# EAGLE board PCB0M8B2 (EAGLE 6.2)
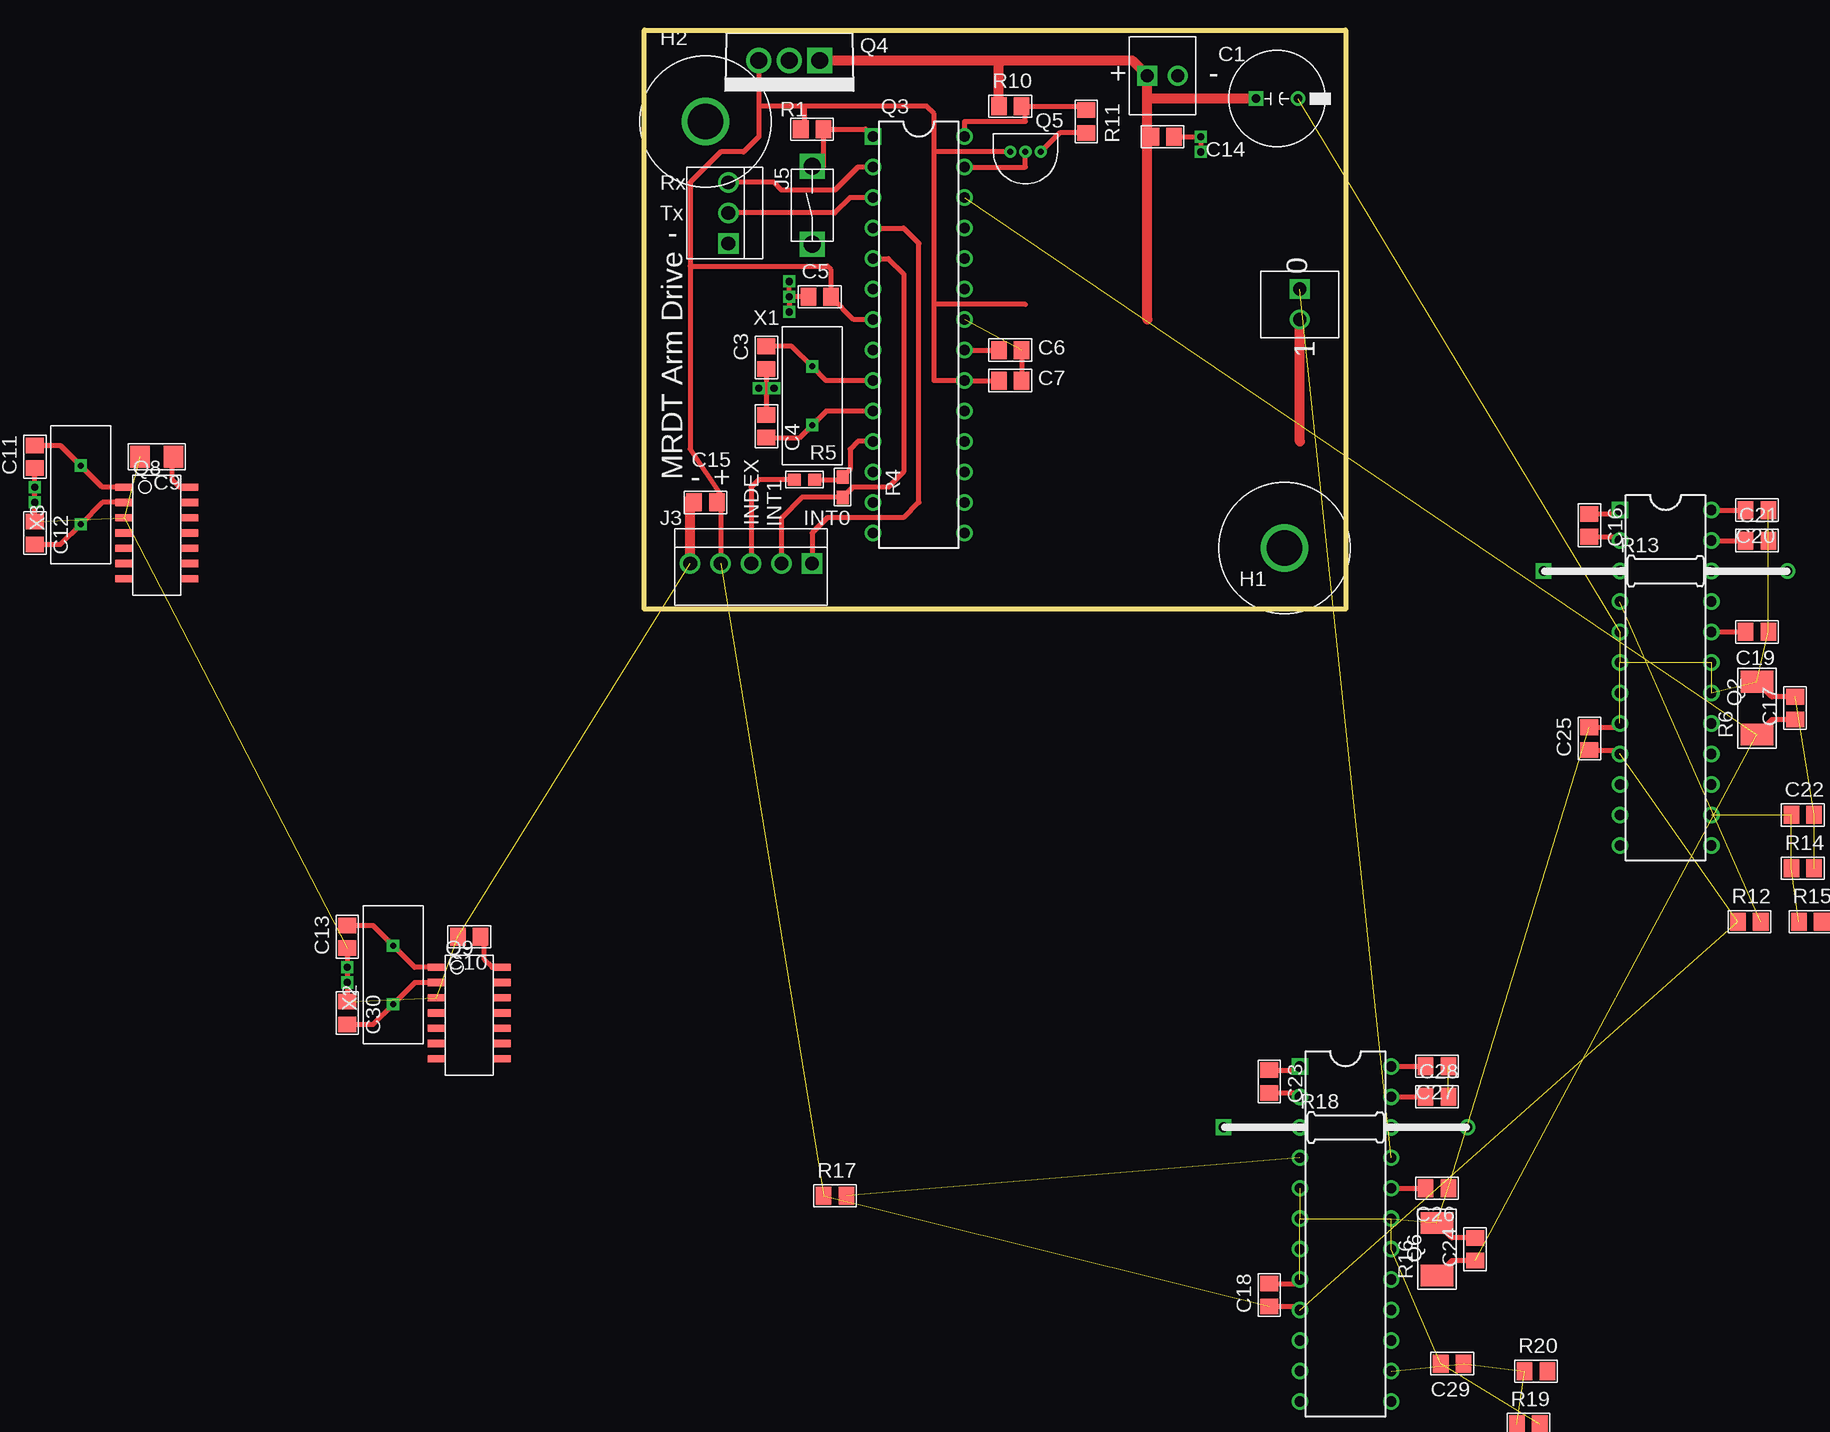
[diagram p0: board, top side]
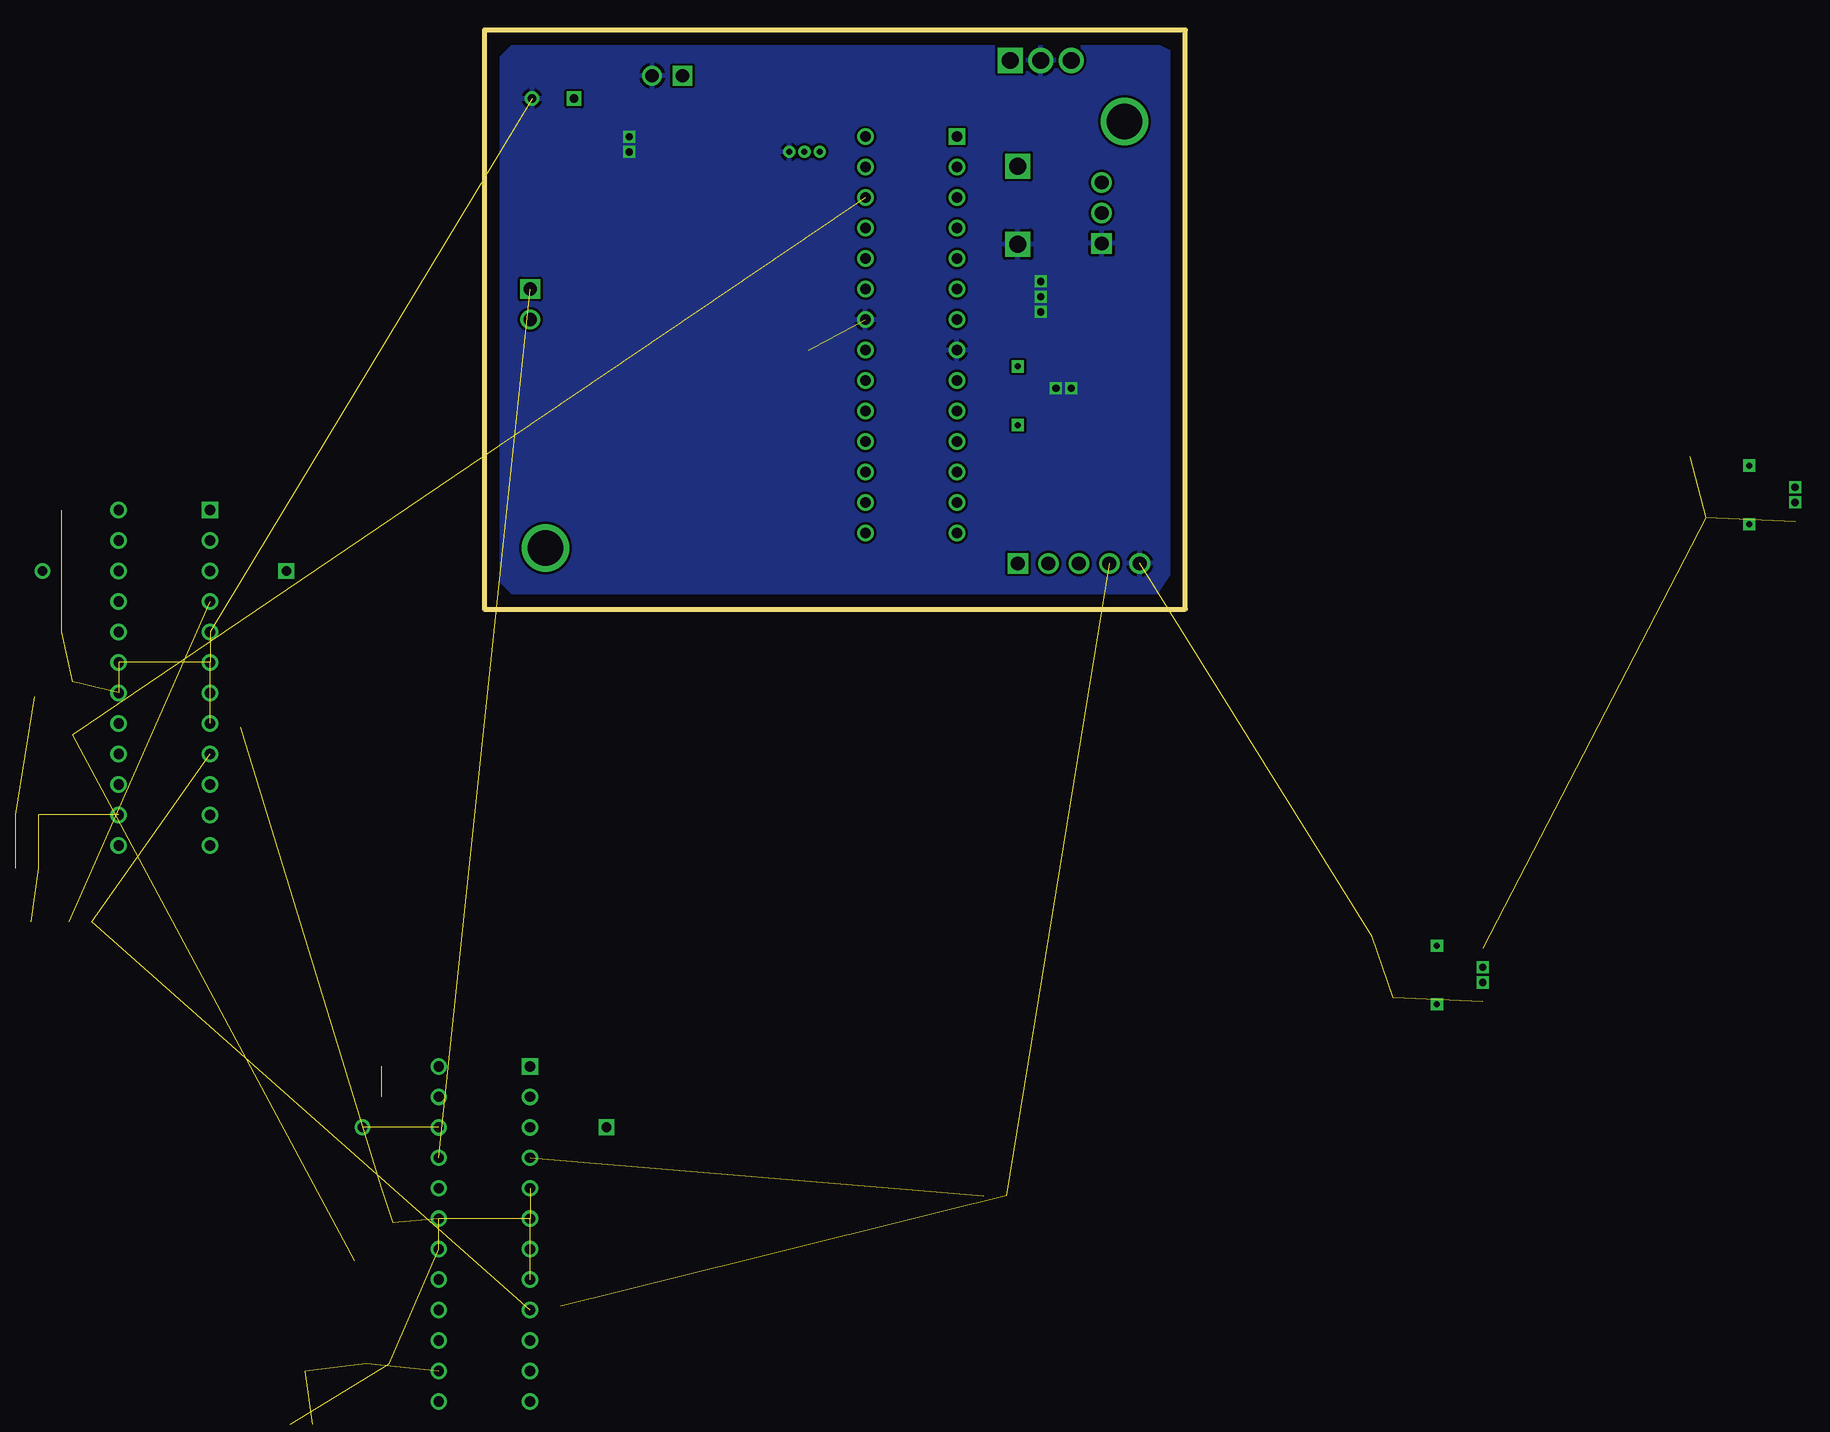
[diagram p1: board, bottom side, seen from below]

Size 58.42 x 48.26 mm. Coordinates in mm from the lower left corner, seen from the top.
Outline: 0,0 0,48.26 58.42,48.26 58.42,0 0,0
Copper layers (1*16): Top 0.035mm / dielectric 1.5mm / Bottom 0.035mm
Design rules: minimum track width 10mil, minimum drill 15mil, track to track 8mil, track to pad 8mil, pad to pad 8mil, via to via 8mil, smd to smd 8mil, copper to edge 40mil, drill to drill 8mil, minimum pad ring 10mil, minimum via ring 8mil, stop-mask expansion 4mil, vias tented up to drill 0mil, thermal gap 10mil

## Footprints (pad centres in the part's own frame; a part is rotated, then mirrored left to right if it is on the bottom)
C_8MM = drill 0.7 square: + -1.75,0 | drill 0.7: - 1.75,0
C_0805 = smd 1.3 x 1.5: 1 -0.95,0; 2 0.95,0
C_1206 = smd 1.6 x 1.8: 1 -1.4,0; 2 1.4,0
H_MNTHOLE_#4 = drill 2.946: 1 0,0
J_2.54MM = drill 1.1 square: P$1 -1.27,0 | drill 1.1: P$2 1.27,0
J_MTA100_5P = drill 1.143 square: 1 5.08,0 | drill 1.143: 2 2.54,0; 3 0,0; 4 -2.54,0; 5 -5.08,0
J_TOGGLE = drill 1.4 square: P$1 -3.25,0; P$2 3.25,0
J_MTA100_3P = drill 1.143 square: 1 2.54,0 | drill 1.143: 2 0,0; 3 -2.54,0
DIP24 = drill 0.864 square: 1 -16.51,-3.81 | drill 0.864: 2 -13.97,-3.81; 3 -11.43,-3.81; 4 -8.89,-3.81; 5 -6.35,-3.81; 6 -3.81,-3.81; 7 -1.27,-3.81; 8 1.27,-3.81; 9 3.81,-3.81; 10 6.35,-3.81; 11 8.89,-3.81; 12 11.43,-3.81; 13 11.43,3.81; 14 8.89,3.81; 15 6.35,3.81; 16 3.81,3.81; 17 1.27,3.81; 18 -1.27,3.81; 19 -3.81,3.81; 20 -6.35,3.81; 21 -8.89,3.81; 22 -11.43,3.81; 23 -13.97,3.81; 24 -16.51,3.81
DIP28 = drill 0.864 square: 1 -16.51,-3.81 | drill 0.864: 2 -13.97,-3.81; 3 -11.43,-3.81; 4 -8.89,-3.81; 5 -6.35,-3.81; 6 -3.81,-3.81; 7 -1.27,-3.81; 8 1.27,-3.81; 9 3.81,-3.81; 10 6.35,-3.81; 11 8.89,-3.81; 12 11.43,-3.81; 13 13.97,-3.81; 14 16.51,-3.81; 15 16.51,3.81; 16 13.97,3.81; 17 11.43,3.81; 18 8.89,3.81; 19 6.35,3.81; 20 3.81,3.81; 21 1.27,3.81; 22 -1.27,3.81; 23 -3.81,3.81; 24 -6.35,3.81; 25 -8.89,3.81; 26 -11.43,3.81; 27 -13.97,3.81; 28 -16.51,3.81
TO-220 = drill 1.397 square: 1 -2.54,0 | drill 1.397: 2 0,0; 3 2.54,0
TO-92-3 = drill 0.5: 1 1.27,0; 2 0,0; 3 -1.27,0
SOIC14 = smd 1.5 x 0.6: 1 -2.7,0; 2 -2.7,-1.27; 3 -2.7,-2.54; 4 -2.7,-3.81; 5 -2.7,-5.08; 6 -2.7,-6.35; 7 -2.7,-7.62; 8 2.7,-7.62; 9 2.7,-6.35; 10 2.7,-5.08; 11 2.7,-3.81; 12 2.7,-2.54; 13 2.7,-1.27; 14 2.7,0
R_0805 = smd 1.3 x 1.5: 1 -0.95,0; 2 0.95,0
R_0603 = smd 1.1 x 1: 1 -0.85,0; 2 0.85,0
R_2010 = smd 1.8 x 2.7: 1 -2.2,0; 2 2.2,0
R_1/4WL = drill 0.8 square: 1 -10.16,0 | drill 0.8: 2 10.16,0
HC-49 = drill 0.5 square: P$1 -2.44,0; P$2 2.44,0

## Placement (x,y rotation side)
C1  330uF  [C_8MM]  52.7,42.55 0 top
C3  15pF  [C_0805]  10.16,20.95 90 top
C4  [C_0805]  10.16,15.24 270 top
C5  [C_0805]  14.61,26.04 0 top
C6  [C_0805]  30.48,21.59 0 top
C7  [C_0805]  30.48,19.05 0 top
C9  [C_1206]  -40.64,12.7 180 top  (outside the outline)
C10  [C_0805]  -14.61,-27.3 180 top  (outside the outline)
C11  [C_0805]  -50.8,12.7 90 top  (outside the outline)
C12  [C_0805]  -50.8,6.35 270 top  (outside the outline)
C13  [C_0805]  -24.77,-27.3 90 top  (outside the outline)
C14  [C_0805]  43.18,39.37 0 top
C15  [C_0805]  5.08,8.89 180 top
C16  0.22uF  [C_0805]  78.74,6.99 270 top  (outside the outline)
C17  [C_0805]  95.89,-8.26 90 top  (outside the outline)
C18  [C_0805]  52.07,-57.15 90 top  (outside the outline)
C19  [C_0805]  92.71,-1.91 180 top  (outside the outline)
C20  [C_0805]  92.71,8.26 180 top  (outside the outline)
C21  [C_0805]  92.71,5.71 0 top  (outside the outline)
C22  0.1uF  [C_0805]  96.52,-17.14 0 top  (outside the outline)
C23  0.22uF  [C_0805]  52.07,-39.37 270 top  (outside the outline)
C24  [C_0805]  69.22,-53.34 90 top  (outside the outline)
C25  [C_0805]  78.74,-10.79 90 top  (outside the outline)
C26  [C_0805]  66.04,-48.26 180 top  (outside the outline)
C27  [C_0805]  66.04,-38.1 180 top  (outside the outline)
C28  [C_0805]  66.04,-40.64 0 top  (outside the outline)
C29  0.1uF  [C_0805]  67.31,-62.87 180 top  (outside the outline)
C30  [C_0805]  -24.77,-33.66 270 top  (outside the outline)
H1  [H_MNTHOLE_#4]  53.34,5.08 0 top
H2  [H_MNTHOLE_#4]  5.08,40.64 0 top
J1  J_1546074-2282834-2  [J_2.54MM]  43.18,44.45 0 top
J2  J_1546074-2282834-2  [J_2.54MM]  54.61,25.4 270 top
J3  [J_MTA100_5P]  8.89,3.81 0 top
J4  J_MC32857  [J_TOGGLE]  13.97,33.66 90 top
J5  [J_MTA100_3P]  6.99,33.02 270 top
Q2  A3959  [DIP24]  85.09,-8.26 270 top  (outside the outline)
Q3  ATMEGA328P  [DIP28]  22.86,22.86 270 top
Q4  LDO  [TO-220]  12.06,45.72 180 top
Q5  LM35  [TO-92-3]  31.75,38.1 0 top
Q6  A3959  [DIP24]  58.42,-54.61 270 top  (outside the outline)
Q8  Q_LFLS7366R-S  [SOIC14]  -40.64,10.16 0 top  (outside the outline)
Q9  Q_LFLS7366R-S  [SOIC14]  -14.61,-29.84 0 top  (outside the outline)
R1  200  [R_0805]  13.97,40.01 180 top
R4  [R_0603]  16.51,10.16 90 top
R5  [R_0603]  13.34,10.79 0 top
R6  [R_2010]  92.71,-8.26 90 top  (outside the outline)
R10  [R_0805]  30.48,41.91 0 top
R11  [R_0805]  36.83,40.64 270 top
R12  51k  [R_0805]  92.08,-26.04 0 top  (outside the outline)
R13  [R_1/4WL]  85.09,3.17 0 top  (outside the outline)
R14  10k  [R_0805]  96.52,-21.59 0 top  (outside the outline)
R15  1k  [R_0805]  97.16,-26.04 0 top  (outside the outline)
R16  [R_2010]  66.04,-53.34 90 top  (outside the outline)
R17  51k  [R_0805]  15.88,-48.9 0 top  (outside the outline)
R18  [R_1/4WL]  58.42,-43.18 0 top  (outside the outline)
R19  10k  [R_0805]  73.66,-67.94 0 top  (outside the outline)
R20  1k  [R_0805]  74.3,-63.5 0 top  (outside the outline)
X1  HC49S  [HC-49]  13.97,17.78 90 top
X2  X_HC49SCRYSTAL  [HC-49]  -20.95,-30.48 90 top  (outside the outline)
X3  X_HC49SCRYSTAL  [HC-49]  -46.99,9.53 90 top  (outside the outline)

## Library data of the parts
C1 J1 J2 J4 Q2-Q6 Q8 Q9 R13 R18 X1-X3 = PCB0M1
C3-C7 C9-C30 R1 R4-R6 R10-R12 R14-R17 R19 R20 = Lib_Passive
H1 H2 J3 J5 = Lib_TH

## Nets
BLANK: Q3.17
D: J5.2 Q3.3
EN: Q3.19
EXTMODE: Q3.16
GND: C1.- C3.1 C4.1 C5.1 C6.2 C7.2 C9.2 C10.2 C11.1 C12.1 C13.1 C14.2 C15.2 C17.2 C18.2 C19.1 C20.1 C21.2 C22.2 C24.2 C25.2 C26.1 C29.2 C30.1 J1.P$2 J3.5 J4.P$1 J5.1 Q2.5 Q2.6 Q2.7 Q2.8 Q2.18 Q2.19 Q3.8 Q3.22 Q4.2 Q5.1 Q6.5 Q6.6 Q6.7 Q6.8 Q6.18 Q6.19 Q8.3 Q9.3 R6.2 R11.2 R14.2 R16.2 R19.2
INTERRUPT1: J3.2 Q3.5 R4.1
INTERRUPT2: J3.1 Q3.4
ISENSE: C17.1 C24.1 Q3.26 R6.1 R16.1
N$1: C4.2 Q3.10 X1.P$1
N$2: C3.2 Q3.9 X1.P$2
N$3: C9.1 Q8.14
N$4: Q3.27 Q5.2
N$5: Q3.28 R10.2 R11.1
N$6: C6.1 Q3.21
N$7: J3.3 R5.1
N$8: J4.P$2 Q3.1 R1.1
N$9: C10.1 Q9.14
N$10: C12.2 Q8.2 X3.P$1
N$11: C16.1 Q2.1
N$12: C16.2 Q2.2
N$13: C11.2 Q8.1 X3.P$2
N$14: Q2.4 R12.2
N$15: C20.2 Q2.24
N$16: C21.1 Q2.23
N$17: Q2.22 R13.2
N$18: C23.1 Q6.1
N$19: C13.2 Q9.1 X2.P$2
N$20: C23.2 Q6.2
N$21: C30.2 Q9.2 X2.P$1
N$22: Q6.4 R17.2
N$23: C27.2 Q6.24
N$24: C28.1 Q6.23
N$25: Q6.22 R18.2
N$26: C27.1 C28.2
OUTA: J2.P$2
OUTB: J2.P$1 Q6.21
PFD1: Q3.14
PFD2: Q3.18
PHASE: Q3.23
PULSE: Q3.11 R4.2 R5.2
R: J5.3 Q3.2
REF1: Q3.15
REF2: C22.1 Q2.14 R14.1 R15.1
REF3: C29.1 Q6.14 R19.1 R20.1
SLEEP1: Q3.24
V5: C5.2 C7.1 C15.1 C18.1 C25.1 J3.4 Q2.9 Q3.7 Q3.20 Q4.3 Q5.3 Q6.9 R1.2 R12.1 R17.1
VIN: C1.+ C14.1 J1.P$1 Q4.1 R10.1
VIN1: C19.2 Q2.20
VIN2: C26.2 Q6.20

## Tracks (layer width: path | path; a pad name or v marks a point on that pad's centre or on a via)
D
  Top 0.406: Q3.3 17.14,34.29 15.88,33.02 J5.2
GND  (via drill 0.6)  (29 unrouted)
  Top 0.406: C6.2 C7.2 | R11.2 34.61,39.69 Q5.1 | C5.1 v12.06,26.04 | v12.06,26.04 v12.06,27.3 | v12.06,26.04 v12.06,24.77 | C14.2 v46.35,39.37 v46.35,38.1 | C3.1 10.16,18.41 | v10.79,18.41 10.16,18.41 | v9.53,18.41 10.16,18.41 | 10.16,18.41 C4.1 | C13.1 v-24.77,-29.84 v-24.77,-31.11 C30.1 | C12.1 v-50.8,8.89 v-50.8,10.16 C11.1 | C17.2 93.96,-7.3 R6.2 | C24.2 67.29,-52.39 R16.2 | C25.2 80.96,-9.85 Q2.8 | C18.2 54.29,-56.2 Q6.8
  Top 0.813: 3.81,8.57 C15.2 3.81,9.21 J3.5
  pour Bottom: 1.27,46.35 2.54,46.99 55.88,46.99 57.15,45.72 57.15,2.54 55.88,1.27 2.54,1.27 1.27,3.17
INTERRUPT1
  Top 0.406: J3.2 11.43,7.62 13.12,9.31 R4.1 17.36,10.16 20.32,10.16 21.59,11.43 21.59,27.94 20.32,29.21 Q3.5
INTERRUPT2
  Top 0.406: Q3.4 21.59,31.75 22.86,30.48 22.86,8.89 21.59,7.62 15.24,7.62 13.97,6.35 J3.1
ISENSE  (2 unrouted)
  Top 0.406: C17.1 93.96,-9.21 R6.1 | C24.1 67.29,-54.29 R16.1
N$1
  Top 0.406: Q3.10 15.14,16.51 X1.P$1 12.92,14.29 C4.2
N$2
  Top 0.406: Q3.9 15.14,19.05 X1.P$2 12.29,21.91 C3.2
N$3
  Top 0.406: Q8.14 -38.73,10.16 -39.37,10.79 -39.37,12.57 C9.1
N$4
  Top 0.406: Q3.27 31.75,36.83 Q5.2
N$5
  Top 0.406: Q3.28 26.67,40.64 31.75,40.64 31.75,41.91 | R10.2 31.75,41.91 | 31.75,41.91 36.51,41.91 R11.1
N$6
  Top 0.406: Q3.21 C6.1
N$7
  Top 0.406: R5.1 9.53,10.79 8.89,10.16 J3.3
N$8
  Top 0.406: J4.P$2 14.92,36.91 R1.1 18.41,40.01 Q3.1
N$9
  Top 0.406: Q9.14 -12.7,-29.84 -13.34,-29.21 -13.34,-27.62 C10.1
N$10
  Top 0.406: Q8.2 -45.19,8.89 X3.P$1 -48.67,5.4 C12.2
N$11
  Top 0.406: C16.1 80.96,7.93 Q2.1
N$12
  Top 0.406: C16.2 80.96,6.04 Q2.2
N$13
  Top 0.406: Q8.1 -45.19,10.16 X3.P$2 -48.67,13.65 C11.2
N$14  (1 unrouted)
N$15
  Top 0.406: Q2.24 C20.2
N$16
  Top 0.406: Q2.23 C21.1
N$17
  Top 0.406: R13.2 Q2.22
N$18
  Top 0.406: C23.1 54.29,-38.42 Q6.1
N$19
  Top 0.406: C13.2 -22.64,-26.36 X2.P$2 -19.15,-29.84 Q9.1
N$20
  Top 0.406: C23.2 54.29,-40.32 Q6.2
N$21
  Top 0.406: Q9.2 -19.15,-31.11 X2.P$1 -22.64,-34.6 C30.2
N$22  (1 unrouted)
N$23
  Top 0.406: Q6.24 C27.2
N$24
  Top 0.406: Q6.23 C28.1
N$25  (1 unrouted)
N$26  (1 unrouted)
OUTA
  Top 0.813: 54.61,13.97 J2.P$2
OUTB  (1 unrouted)
PULSE
  Top 0.406: Q3.11 17.78,13.97 17.14,13.34 17.14,11.64 R4.2 16.3,10.79 R5.2
R
  Top 0.406: Q3.2 17.78,36.83 15.88,34.92 11.43,34.92 10.79,35.56 J5.3
REF2  (3 unrouted)
REF3  (3 unrouted)
V5  (4 unrouted)
  Top 0.406: C7.1 Q3.20 24.13,19.05 24.13,25.4 | 24.13,25.4 24.13,38.1 | C15.1 6.35,8.89 | 6.35,8.89 J3.4 | 31.75,25.4 24.13,25.4 | Q5.3 24.13,38.1 | 24.13,38.1 24.13,41.27 23.5,41.91 13.34,41.91 | 6.35,8.89 6.35,9.53 3.81,13.34 3.81,28.57 | 3.81,28.57 15.24,28.57 15.55,28.26 C5.2 17.46,24.13 Q3.7 17.78,24.13 | 13.34,41.91 9.53,41.91 | Q4.3 9.53,41.91 | 9.53,41.91 9.53,39.37 8.26,38.1 6.35,38.1 3.81,35.56 3.81,28.57 | 13.34,41.91 13.34,40.01 R1.2 12.7,40.01 | C25.1 80.96,-11.74 Q2.9 | C18.1 54.29,-58.1 Q6.9
VIN
  Top 0.813: 41.91,24.13 41.91,38.73 | 41.91,38.73 41.91,39.05 | 41.91,39.05 C14.1 42.23,39.05 41.91,38.73 | 41.91,39.05 41.91,42.55 | 41.91,42.55 J1.P$1 40.64,45.72 29.21,45.72 | Q4.1 29.21,45.72 | R10.1 29.53,45.4 29.21,45.72 | C1.+ 41.91,42.55
VIN1
  Top 0.406: Q2.20 C19.2
VIN2
  Top 0.406: Q6.20 C26.2

## Text on the board
tPlace: + | - | Rx | Tx | - | 0 | 1 | MRDT Arm Drive | INT1 | - | + | INT0 | INDEX